# Altium PCB control_bath_pcb.PcbDoc
Units mm, origin at the board's own origin, x right, y up, seen from the top; angles counter-clockwise.
Board outline 75.5 x 55 mm, 2 copper layers (Top Layer, Bottom Layer); 21 components, 16 nets, 79 pads, 0 vias.
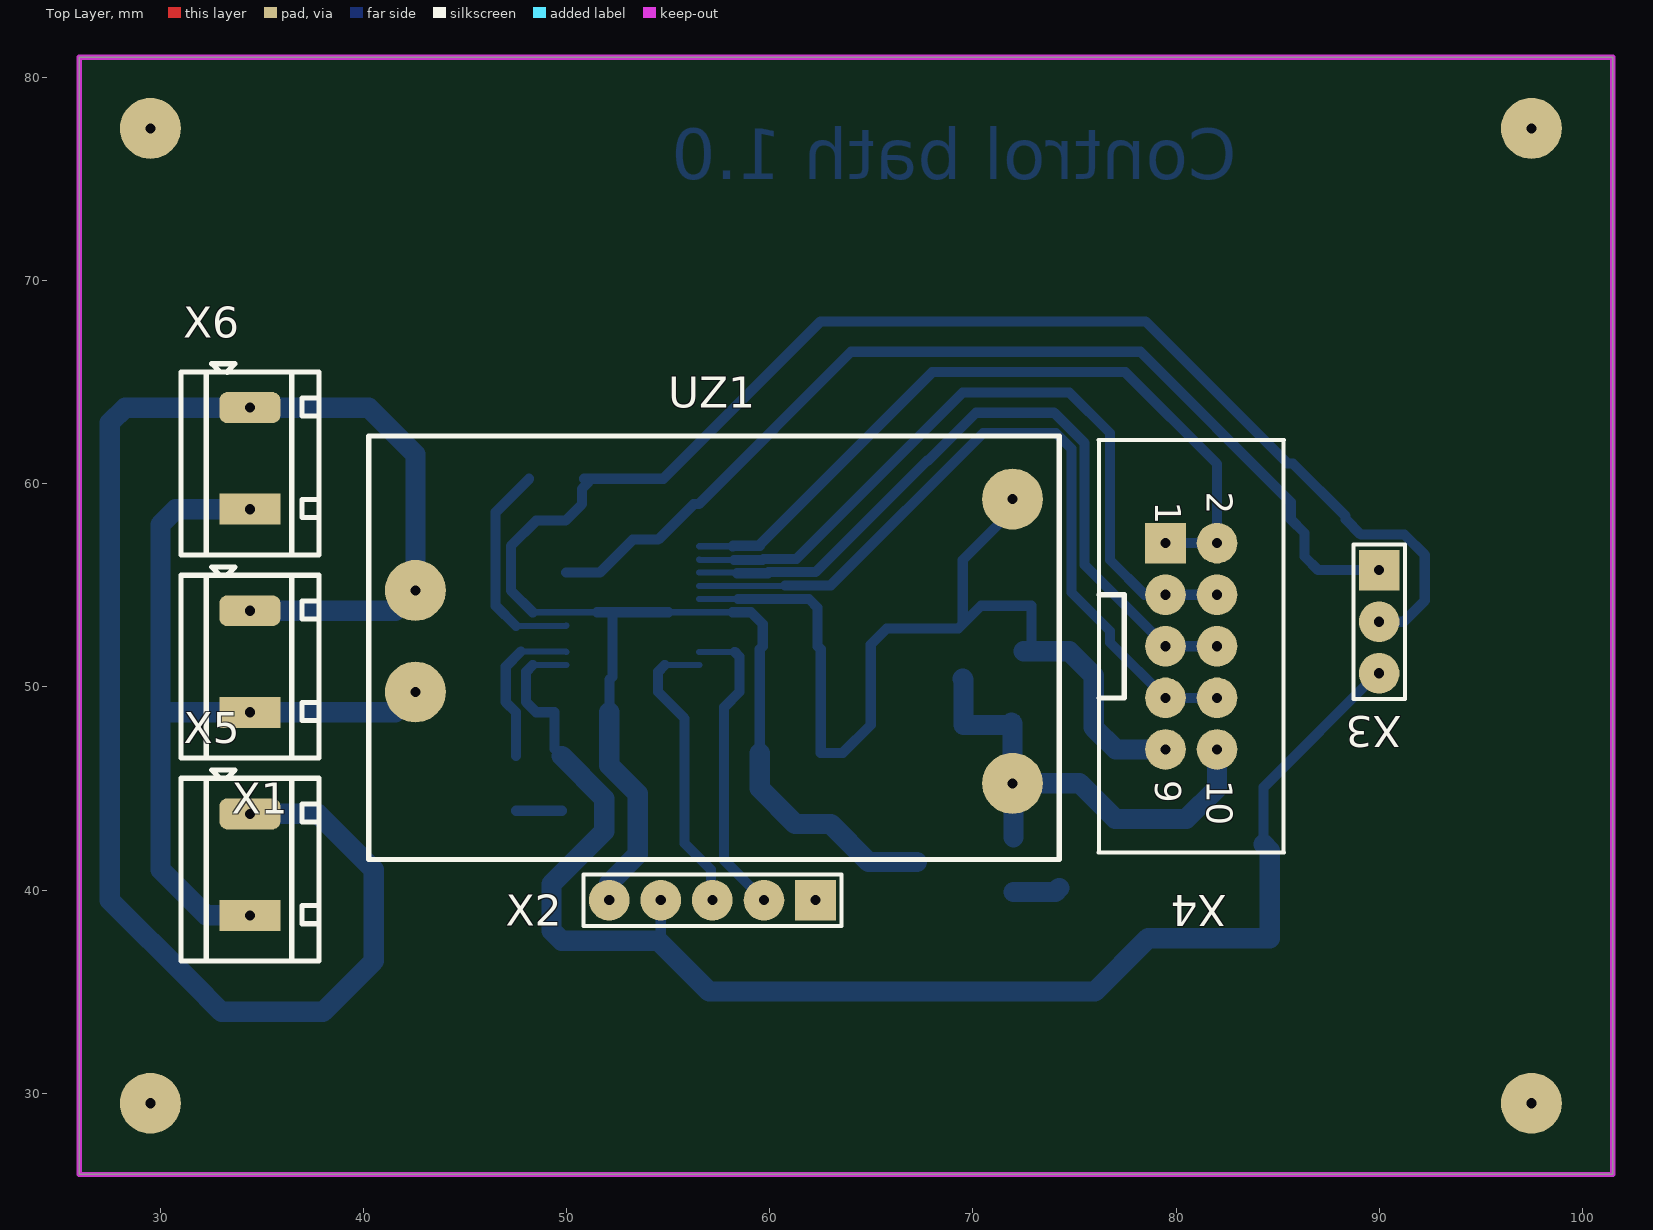
[diagram p0: Top Layer view]
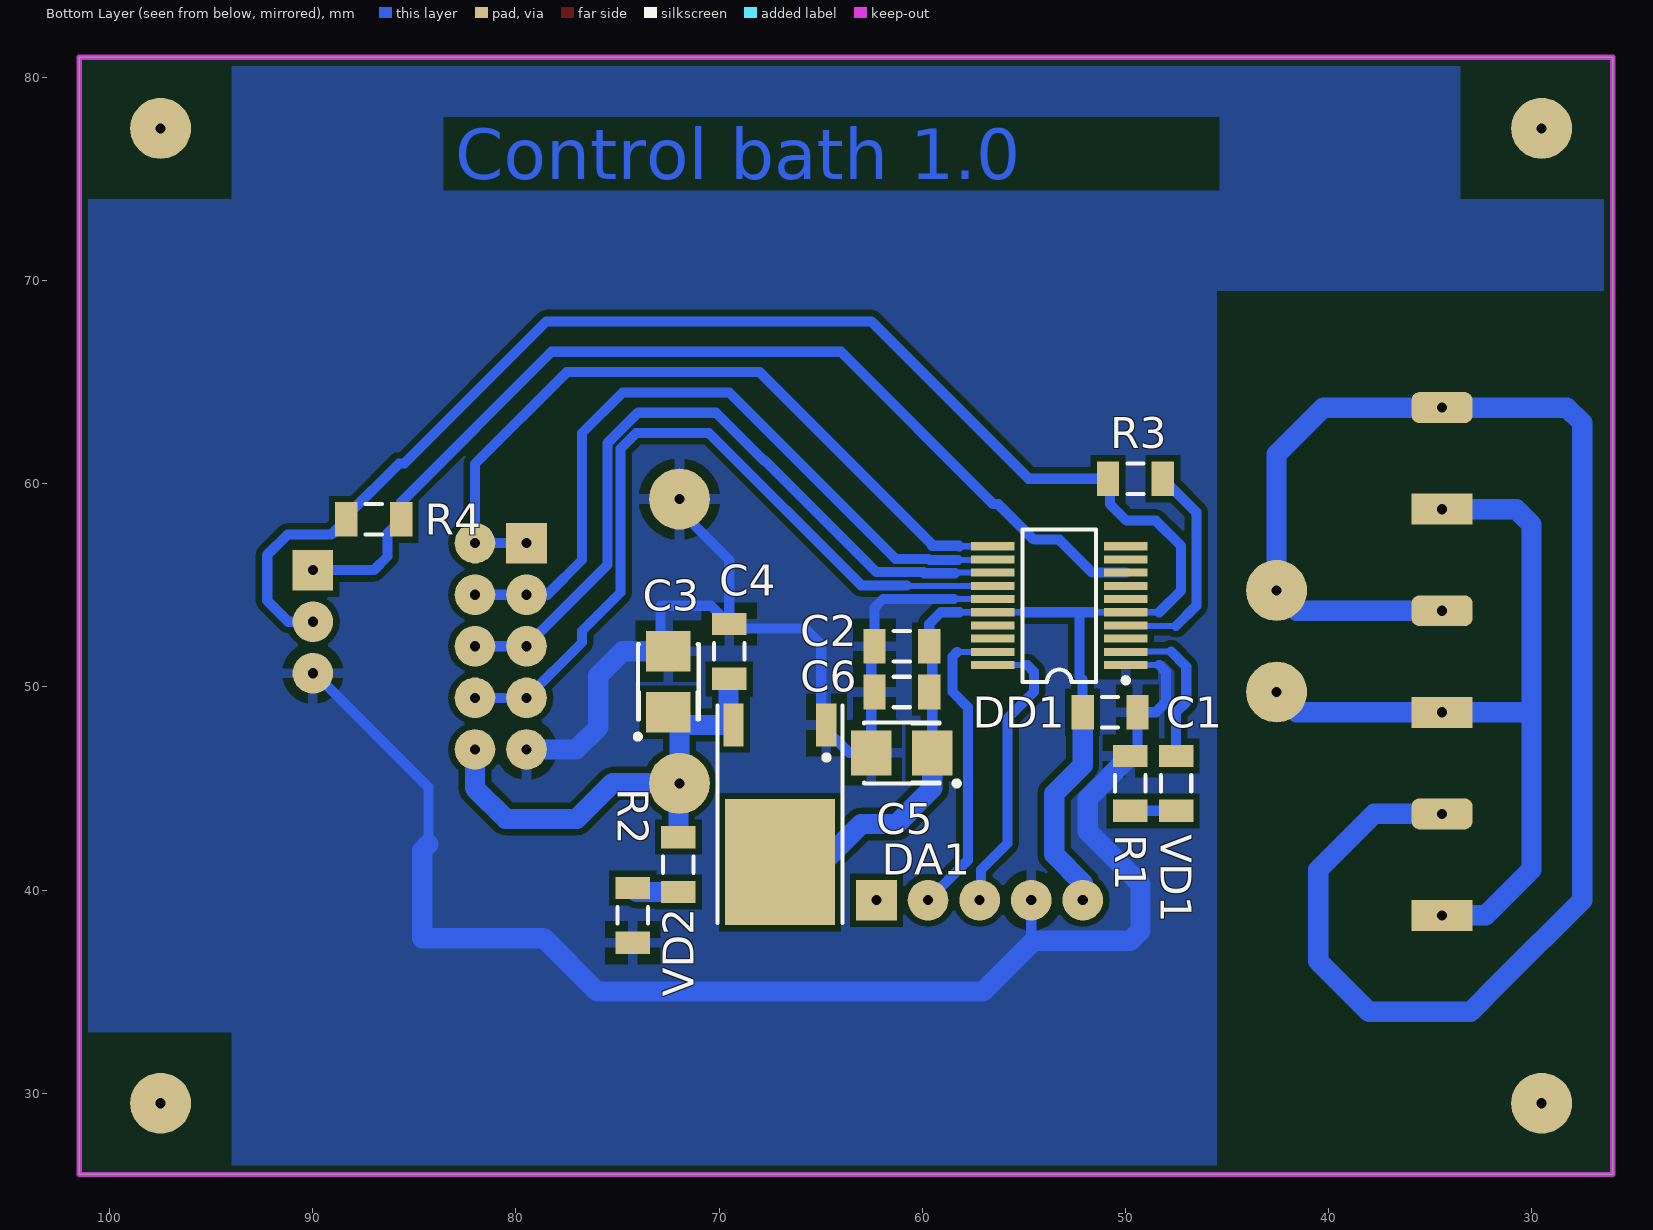
[diagram p1: Bottom Layer view, seen from below]

## Layer stack, top to bottom
Top Solder: solder mask 0.0102, Solder Resist, Dk 3.5
Top Layer: signal copper 0.0356
Dielectric 1: dielectric 0.32, FR-4, Dk 4.8
Bottom Layer: signal copper 0.0356
Bottom Solder: solder mask 0.0102, Solder Resist, Dk 3.5

## Board outline
26,26 26,81 101.5,81 101.5,26

## Design rules (kind name [scope] priority, off if disabled: settings)
Clearance Clearance_Poly_Mounting [InPolygon vs (IsPad AND InNet('No Net'))] p1: gap=5
Clearance Clearance_Poly_PWR [InPolygon vs InNetClass('PWR')] p2: gap=2
Clearance Clearance_Poly [InPolygon] p3: gap=0.3
Clearance Clearance_Vias [All vs IsVia] p4: gap=0.25
Clearance Clearance_PAD [All vs (IsPad AND OnLayer('Multi-Layer'))] p5: gap=0.25
Clearance Clearance_1 [All] p6: gap=0.15
PlaneClearance [All] p1: clearance=0.5
PolygonConnect PolygonConnect_1 [All vs IsNamedPolygon('Top Layer-No Net')] p1: connectstyle=Relief reliefconductorwidth=0.5 reliefentries=4 polygonreliefangle="90 Angle" airgapwidth=0.5
PolygonConnect [All] p2: connectstyle=Direct reliefconductorwidth=0.254 reliefentries=4 polygonreliefangle="90 Angle" airgapwidth=0.254
RoutingVias [All] p1: holewidth=0.6 width=1.2 viastyle="Through Hole" minholewidth=0.6 minwidth=1.2 maxholewidth=0.6 maxwidth=1.2
SilkToSolderMaskClearance SilkscreenOverComponentPads [IsPad] p1: minsilkscreentomaskgap=0.254 clearancetoexposedcopper=TRUE
SolderMaskExpansion [All] p1: expansion=0.102
Width Width_PWR [InNetClass('PWR')] p1: maxlimit=2 minlimit=1 preferedwidth=1.5
Width [All] p2: maxlimit=1 minlimit=0.3 preferedwidth=0.5
28 further rules are at their usual default settings.

## Components (designator, comment, footprint, x,y, rotation, side; value= is the part's Value field where it differs from the comment)
C1 "C_2" C1206 50.75,48.75 r0 bottom
C2 "C_2" C1206 61,52 r180 bottom
C3 "C_E" B 72.5,50.25 r90 bottom
C4 "C_2" C1206 69.5,51.75 r270 bottom
C5 "C_E" B 61,46.75 r0 bottom
C6 "C_2" C1206 61,49.75 r180 bottom
DA1 "LM1117" D-PAK 67,44.75 r0 bottom
DD1 "ST32F030F4" SSOP20 53.25,54 r90 bottom
R1 "R_1" R1206 49.75,45.25 r90 bottom
R2 "R_1" R1206 74.25,38.75 r90 bottom
R3 "R_1" R1206 49.5,60.25 r0 bottom
R4 "R_1" R1206 87,58.25 r0 bottom
UZ1 "HLK-PM01" HLK-PM01 57.25,52.25 r0 top
VD1 "LED" L1206 47.5,45.25 r270 bottom
VD2 "LED" L1206 72,41.25 r270 bottom
X1 "PLS2" DG126-5-02P-14-00AH 31,55.5 r270 top
X2 "PLS5" HDR1X5 62.25,39.5 r180 top
X3 "PLS3" HDR1X3 90,55.75 r270 top
X4 "BH10" BH10 80.75,52 r270 top
X5 "PLS2" DG126-5-02P-14-00AH 31,45.5 r270 top
X6 "PLS2" DG126-5-02P-14-00AH 31,65.5 r270 top

## Footprints (in the part's own frame and the unit in brackets; to place one, negate y for a bottom-side part, rotate by r counter-clockwise, add the part's x,y. Pads: shape width x height; smd on the part's side, far side on the other; paste and mask are expansions set on the pad)
B [mm] "Capacitor, SM Tantalum; Body 3.5 x 2.8 mm (LxW typ)"
  rect 2x2.2 smd: 1(-1.5,0) 2(1.5,0)
  silkscreen extent -2.82,-1.5 1.85,1.63, body extent -1.83,-1.4 1.83,1.4, height 1.85
BH10 [mm] "Connector; Header; 5x2 Position"
  rect 2x2 hole 0.5: 1(-5.08,-1.27)
  round 2 hole 0.5: 2(-5.08,1.27) 3(-2.54,-1.27) 4(-2.54,1.27) 5(0,-1.27) 6(0,1.27) 7(2.54,-1.27) 8(2.54,1.27) 9(5.08,-1.27) 10(5.08,1.27)
  silkscreen extent -10.16,-4.57 10.16,4.57, body extent -10.18,-4.55 10.18,4.65, height 8.84
C1206 [mm] "Chip Capacitor, Body 3.2x1.6mm, IPC High Density"
  rect 1.1x1.7 smd: 1(-1.35,0) 2(1.35,0)
  silkscreen extent -0.4,-0.75 0.4,0.75, body extent -1.6,-0.83 1.6,0.83, height 1.53
D-PAK [mm] "D-PAK/TO-252-AA; 3 Leads (1 Cropped); Body 10.1 (inc. leads) x 6.6 mm (LxW max)"
  rect 1x2.1 smd: 1(-2.285,-3.375) 3(2.285,-3.375)
  rect 5.4x6.2 smd: 4(0,3.375)
  silkscreen extent -3.09,-4.32 3.09,6.38, body extent -3.25,-3.55 3.25,5.95, height 2.3
DG126-5-02P-14-00AH [mm] "Terminal Block 2pin, pitch 5mm"
  rect 1.524x3 hole 0.5: 1(6.75,3.4)
  rrect50% 1.524x3 hole 0.5: 2(1.75,3.4)
  silkscreen extent -0.41,0 9,6.8, body extent -0.95,0.1 9.3,7.9, height 10.7
HDR1X3 [mm] "Connector; Header; 3 Position"
  rect 2x2 hole 0.5: 1(0,0)
  round 2 hole 0.5: 2(2.54,0) 3(5.08,0)
  silkscreen extent -1.27,-1.27 6.35,1.27, body extent -1.27,-1.27 6.35,1.27, height 8.44
HDR1X5 [mm] "Connector; Header; 5 Position"
  rect 2x2 hole 0.5: 1(0,0)
  round 2 hole 0.5: 2(2.54,0) 3(5.08,0) 4(7.62,0) 5(10.16,0)
  silkscreen extent -1.27,-1.27 11.43,1.27, body extent -1.27,-1.27 11.43,1.27, height 8.54
HLK-PM01 [mm]
  round 3 hole 0.5: 1(-14.7,2.5) 2(-14.7,-2.5) 3(14.7,7) 4(14.7,-7)
  silkscreen extent -17,-10.75 17,10.1, body extent -17,-10.75 17,10.1, height 15
L1206 [mm] "LED"
  rect 1.1x1.7 smd: 1(-1.35,0) 2(1.35,0)
  silkscreen extent -0.4,-0.75 0.4,0.75, body extent -1.6,-0.8 1.6,0.8, height 0.58
R1206 [mm] "Chip Resistor"
  rect 1.1x1.7 smd: 1(-1.35,0) 2(1.35,0)
  silkscreen extent -0.4,-0.75 0.4,0.75, body extent -1.6,-0.83 1.6,0.83, height 0.53
SSOP20 [mm] "SSOP, Plastic; 20 Leads; Body Width 5.3 mm; Pitch 0.65 mm"
  rect 0.4x2.15 smd: 1(-2.925,-3.275) 2(-2.275,-3.275) 3(-1.625,-3.275) 4(-0.975,-3.275) 5(-0.325,-3.275) 6(0.325,-3.275) 7(0.975,-3.275) 8(1.625,-3.275) 9(2.275,-3.275) 10(2.925,-3.275) 11(2.925,3.275) 12(2.275,3.275) 13(1.625,3.275) 14(0.975,3.275) 15(0.325,3.275) 16(-0.325,3.275) 17(-0.975,3.275) 18(-1.625,3.275) 19(-2.275,3.275) 20(-2.925,3.275)
  silkscreen extent -3.8,-3.4 3.75,1.8, body extent -3.3,-3.3 3.3,3.3, height 1.2

## Free pads (board coordinates)
  round 3 hole 0.5: 0(29.5,29.5) 0(29.5,77.5) 0(97.5,29.5) 0(97.5,77.5)

## Nets (pads, with @x,y where several pads share a name; then routed paths per layer and width w, separated by ;. In a path a pad name is that pad's centre, name@x,y a point inside that pad or via, vN(x,y) a via of type N, cw(c..) or ccw(c..) an arc to the next point about the centre after c; other vN are vias at no path point)
+3.3V: C1.2 C2.2 C5.1 C6.2 DA1.4 DD1.5 DD1.16 R3.2 R4.2 X2.5 X3.2 | length 108.3
  Bottom Layer w0.3: 48.325,53.675 DD1.5 51.5,53.675 ; 55,53.675 DD1.16 58.175,53.675
  Bottom Layer w0.5: 48.325,53.675 47.25,54.75 47.25,56.939 48.5,58.189 49.939,58.189 50.75,59 50.75,59.75 R3.2@51.05,60.05 ; R3.2 54.75,60.25 62.5,68 78.5,68 85.5,61 85.75,61 88.35,58.4 R4.2 89.1,57.5 91.25,57.5 92.25,56.5 92.25,54.25 91.21,53.21 X3.2 X3.2@89.81,53.4 ; 51.5,53.675 52.25,53.675 ; C1.2 52.1,50.35 52.25,50.5 52.25,53.675 ; 55,53.675 52.25,53.675 ; 58.175,53.675 59.075,53.675 59.65,53.1 C2.2
  Bottom Layer w0.508: C5.1 59.5,51.85 C2.2
  Bottom Layer w1: X2.5 52.09,40.34 53.5,41.75 53.5,44.75 52.1,46.15 C1.2 ; C5.1 59.5,45 61.25,43.25 63,43.25 64.875,41.375 DA1.4@67.25,41.375
+5V: C3.1 C4.2 DA1.3 UZ1.4 VD2.1 X4.10 | length 23.7
  Bottom Layer w1: C4.2 69.535,50.365 69.535,48.125 71.775,48.125 71.9,48.25 71.95,48.2 UZ1.4 ; VD2.1 72,45.2 UZ1.4 ; X4.10 82.02,46.27 82.02,45.02 80.5,43.5 77,43.5 75.25,45.25 UZ1.4
DQ: DD1.8 R4.1 X3.1 | length 50.2
  Bottom Layer w0.5: DD1.8 51.625,55.625 53.25,57.25 54.5,57.25 56.25,59 56.5,59 64,66.5 78.25,66.5 85.65,59.1 R4.1 86.325,57.575 86.325,56.425 87,55.75 X3.1
GND: C1.1 C2.1 C3.2 C4.1 C5.2 C6.1 DA1.1 DD1.1 DD1.15 R1.2 R2.1 UZ1.3 X2.4 X3.3 X4.9 | length 122.2
  Bottom Layer w0.3: 48.325,51.075 DD1.1 ; DD1.15 58.425,54.325
  Bottom Layer w0.5: 48.325,51.075 48,50.75 48,49.25 48.5,48.75 C1.1 49.4,46.95 R1.2 ; 58.425,54.325 61.925,54.325 62.35,53.9 C2.1 ; DA1.1@64.965,48.125 64.965,52.09 65.75,52.875 69.275,52.875 C4.1 ; UZ1.3 71.95,58.7 69.5,56.25 C4.1 ; C3.2 72.885,52.135 72.885,54 70.4,54 C4.1 ; 84.315,42.25 84.315,45.065 89.92,50.67 X3.3
  Bottom Layer w0.508: 54.63,37.62 X2.4 ; C2.1 62.5,51.85 C5.2 63.59,46.75 DA1.1@64.965,48.125
  Bottom Layer w1: R1.2 51.85,44.5 51.85,42.9 49.25,40.3 49.25,38 49.75,37.5 54.51,37.5 57.01,35 76,35 78.62,37.62 84.62,37.62 84.62,41.945 84.315,42.25 ; C3.2 74.75,51.75 75.95,50.55 75.95,48 77.03,46.92 X4.9
NetDD1_2: DD1.2 VD1.1 | length 7.9
  Bottom Layer w0.3: 47.75,51.75 49.95,51.75 DD1.2
  Bottom Layer w0.5: VD1.1 47.5,48.75 47,49.25 47,51 47.75,51.75
NetDD1_4: DD1.4 R3.1 | length 10.8
  Bottom Layer w0.3: 47.5,53 49.95,53 DD1.4
  Bottom Layer w0.5: 47.5,53 46.5,54 46.5,58.6 R3.1
NetR1_1: R1.1 VD1.2 | length 2.3
  Bottom Layer w0.508: VD1.2 R1.1
NetR2_2: R2.2 VD2.2 | length 2.3
  Bottom Layer w1: VD2.2 74.05,39.9 R2.2
NetUZ1_1: UZ1.1 X1.2 X5.2 X6.2 | length 84.1
  Bottom Layer w1: X5.2 37.75,43.75 40.5,41 40.5,36.5 38,34 33,34 31.5,35.5 27.5,39.5 27.5,63 28.25,63.75 X6.2 40.25,63.75 42.55,61.45 UZ1.1 UZ1.1@42.3,54.5 ; X1.2 41.55,53.75 UZ1.1@42.3,54.5 ; UZ1.1@43.3,54.5 UZ1.1@42.3,54.5
NetUZ1_2: UZ1.2 X1.1 X5.1 X6.1 | length 41.1
  Bottom Layer w1: X5.1 32.25,38.75 30,41 30,48.5 ; X6.1 30.75,58.75 30,58 30,48.5 ; UZ1.2 UZ1.2@42.3,49.5 ; UZ1.2@43.3,49.5 UZ1.2@42.3,49.5 ; 30,48.5 30.25,48.75 X1.1 41.55,48.75 UZ1.2@42.3,49.5
REL0: DD1.11 X4.1 X4.2 | length 37.4
  Bottom Layer w0.3: DD1.11 58.175,56.925
  Bottom Layer w0.5: 58.175,56.925 58.2,56.95 59.5,56.95 59.5,57 68,65.5 77.5,65.5 82.02,60.98 X4.2 X4.1
REL1: DD1.12 X4.3 X4.4 | length 36.7
  Bottom Layer w0.3: DD1.12 56.55,56.25 58.25,56.25
  Bottom Layer w0.5: 58.25,56.25 59.631,56.25 59.681,56.3 61.3,56.3 69.5,64.5 74.75,64.5 76.75,62.5 76.75,56.25 78.46,54.54 X4.3 X4.4
REL2: DD1.13 X4.5 X4.6 | length 37.1
  Bottom Layer w0.3: DD1.13 58.375,55.625 58.4,55.6
  Bottom Layer w0.5: 58.375,55.6 58.4,55.6 59.9,55.6 59.95,55.65 62.25,55.65 67.75,61.15 67.8,61.15 70.15,63.5 74,63.5 75.5,62 75.5,56 79.48,52.02 X4.5 X4.6
REL3: DD1.14 X4.7 X4.8 | length 39
  Bottom Layer w0.3: DD1.14 60.725,54.975 60.75,55
  Bottom Layer w0.5: 60.75,55 63,55 70.5,62.5 74.081,62.5 74.85,61.731 74.85,54.65 76.75,52.75 76.75,52.19 X4.7 X4.8 X4.8@82.54,49.46
SWCLK: DD1.20 X2.3 | length 14.5
  Bottom Layer w0.3: 54.825,51.075 DD1.20
  Bottom Layer w0.5: 54.825,51.075 54.5,50.75 54.5,49.75 55.8,48.45 55.8,42.3 57.1,41 57.1,39.57 X2.3
SWDIO: DD1.19 X2.2 | length 15.2
  Bottom Layer w0.3: DD1.19 58.275,51.725
  Bottom Layer w0.5: 58.275,51.725 58.5,51.5 58.5,49.75 57.75,49 57.75,41.46 X2.2
pads on no net: DD1.3 DD1.6 DD1.7 DD1.9 DD1.10 DD1.17 DD1.18 X2.1

## Polygon pours and split planes (outlines as drawn)
GND on Bottom Layer "Top Layer-No Net" (solid, remove dead copper, pour order 2): 26,26 26,81 101.5,81 101.5,26

## Keep-outs
Keep-Out Layer:
  the board outline again, w0.254

## Other copper
Bottom Layer:
  pour cut-out: 94,26 94,33 101.5,33 101.5,26
  pour cut-out: 94,74 94,81 101.5,81 101.5,74
  pour cut-out: 26,74 26,81 33.5,81 33.5,74
  pour cut-out: 26,26 26,33 33.5,33 33.5,26
  pour cut-out: 26,26 45.5,26 45.5,69.5 26,69.5
  text "Control bath 1.0" at 83,75 h2.5

## Text inside footprints (layer, text, board x,y; h text height)
X4: Top Overlay "10" at 81.512,45.396 h1.27 r270; Top Overlay "9" at 78.972,45.396 h1.27 r270; Top Overlay "1" at 78.972,59.112 h1.27 r270; Top Overlay "2" at 81.512,59.62 h1.27 r270